# EAGLE board CT_schematic (EAGLE 7.6.0)

Size 100 x 80 mm. Coordinates in mm from the lower left corner, seen from the top.
Outline: 0,0 100,0 100,80 0,80 0,0
Copper layers (1*16): Top 0.035mm / dielectric 1.5mm / Bottom 0.035mm
Design rules "default": minimum track width 10mil, minimum drill 24mil, track to track 8mil, track to pad 8mil, pad to pad 8mil, via to via 8mil, smd to smd 8mil, copper to edge 40mil, drill to drill 8mil, minimum pad ring 10mil, minimum via ring 8mil, stop-mask expansion 4mil, vias tented up to drill 0mil, thermal gap 10mil

## Footprints (pad centres in the part's own frame; a part is rotated, then mirrored left to right if it is on the bottom)
C0603 = smd 0.8 x 0.8: 1 -0.762,0; 2 0.762,0
C0402 = smd 0.5 x 0.5: 1 -0.508,0; 2 0.508,0
C1210 = smd 1.2 x 2.5: 1 -1.524,0; 2 1.524,0
C0805 = smd 1.2 x 1.3: 1 -1.016,0; 2 1.016,0
EXV-9B = smd 2.718 x 1.778: 1 -2.108,0; 2 2.108,0
EXV-9H = smd 3.505 x 1.676: 1 -2.857,0; 2 2.857,0
L0603 = smd 0.8 x 0.8: 1 -0.762,0; 2 0.762,0
PJ-037B_PACKAGE = drill 3.7 square: 1 12,0 | drill 3.2 square: 2 6,0
R0603 = smd 0.8 x 0.8: 1 -0.762,0; 2 0.762,0
LQFP48 = smd 0.3 x 1.2: 1 -2.75,-4.25; 2 -2.25,-4.25; 3 -1.75,-4.25; 4 -1.25,-4.25; 5 -0.75,-4.25; 6 -0.25,-4.25; 7 0.25,-4.25; 8 0.75,-4.25; 9 1.25,-4.25; 10 1.75,-4.25; 11 2.25,-4.25; 12 2.75,-4.25; 25 2.75,4.25; 26 2.25,4.25; 27 1.75,4.25; 28 1.25,4.25; 29 0.75,4.25; 30 0.25,4.25; 31 -0.25,4.25; 32 -0.75,4.25; 33 -1.25,4.25; 34 -1.75,4.25; 35 -2.25,4.25; 36 -2.75,4.25 | smd 1.2 x 0.3: 13 4.25,-2.75; 14 4.25,-2.25; 15 4.25,-1.75; 16 4.25,-1.25; 17 4.25,-0.75; 18 4.25,-0.25; 19 4.25,0.25; 20 4.25,0.75; 21 4.25,1.25; 22 4.25,1.75; 23 4.25,2.25; 24 4.25,2.75; 37 -4.25,2.75; 38 -4.25,2.25; 39 -4.25,1.75; 40 -4.25,1.25; 41 -4.25,0.75; 42 -4.25,0.25; 43 -4.25,-0.25; 44 -4.25,-0.75; 45 -4.25,-1.25; 46 -4.25,-1.75; 47 -4.25,-2.25; 48 -4.25,-2.75
TST-110-05-T-D-RA = drill 1 pad 1.7 square: 1 0,0 | drill 1 pad 1.7: 2 0,2.54; 3 2.54,0; 4 2.54,2.54; 5 5.08,0; 6 5.08,2.54; 7 7.62,0; 8 7.62,2.54; 9 10.16,0; 10 10.16,2.54; 11 12.7,0; 12 12.7,2.54; 13 15.24,0; 14 15.24,2.54; 15 17.78,0; 16 17.78,2.54; 17 20.32,0; 18 20.32,2.54; 19 22.86,0; 20 22.86,2.54
QFN-28 = smd 0.813 x 0.305: 1 -2.451,1.5; 2 -2.451,1; 3 -2.451,0.5; 4 -2.451,0; 5 -2.451,-0.5; 6 -2.451,-1; 7 -2.451,-1.5; 15 2.451,-1.5; 16 2.451,-1; 17 2.451,-0.5; 18 2.451,0; 19 2.451,0.5; 20 2.451,1; 21 2.451,1.5 | smd 0.305 x 0.813: 8 -1.5,-2.451; 9 -1,-2.451; 10 -0.5,-2.451; 11 0,-2.451; 12 0.5,-2.451; 13 1,-2.451; 14 1.5,-2.451; 22 1.5,2.451; 23 1,2.451; 24 0.5,2.451; 25 0,2.451; 26 -0.5,2.451; 27 -1,2.451; 28 -1.5,2.451 | smd 3.607 x 3.607: 29 0,0
SJ-43515TS-SMT-TR = smd 2.2 x 3: 1 0.6,-7.4; 4 3.4,-7.4 | smd 3 x 3: 2 12.8,-7.4; 5 17,-3 | smd 2 x 3: 3 5.3,0; 6 2.5,0 | drill 1.8: P$7 4.5,-3.69; P$8 11.54,-3.69
ABS07-32.768KHZ-7-T = smd 1.1 x 2.4: 1 -2.5,0; 2 0,0
ABLS-25.000MHZ-B2F-T = smd 5.6 x 2.8: 1 -3.81,0; 2 5.69,0
ASFL1 = smd 1.7 x 1.5: 1 -1.27,-1.1; 2 1.27,-1.1; 3 1.27,1.1; 4 -1.27,1.1
LP2954 = smd 1.6 x 0.6: 1 -2.475,1.905 | smd 1.55 x 0.6: 2 -2.475,0.635; 3 -2.475,-0.635; 4 -2.475,-1.905; 5 2.475,-1.905; 6 2.475,-0.635; 7 2.475,0.635; 8 2.475,1.905
SON-6 = smd 0.55 x 0.3: 1 -0.355,0.5 | smd 0.52 x 0.3: 2 -0.37,0; 3 -0.37,-0.5; 4 0.37,-0.5; 5 0.37,0; 6 0.37,0.5
SW_4-1437565-2 = smd 1.4 x 2.1: 1 -2.23,4.55; 2 -2.23,-4.55; 3 2.23,4.55; 4 2.23,-4.55
LGM67K-G1J2-24-Z = smd 0.8 x 1.4: A -2,0; C 0,0
NC7SZ125M5X = smd 1.3 x 0.7: 1 -1.3,0.95; 2 -1.3,0; 3 -1.3,-0.95; 4 1.3,-0.95; 5 1.3,0.95

## Placement (x,y rotation side)
C1  1e-07  [C0603]  -43.18,68.58 0 top  (outside the outline)
C2  1e-07  [C0603]  -46.99,68.58 0 top  (outside the outline)
C3  1e-07  [C0603]  -50.8,68.58 0 top  (outside the outline)
C4  1e-07  [C0603]  -54.61,68.58 0 top  (outside the outline)
C5  4.7e-06  [C0603]  -39.37,68.58 0 top  (outside the outline)
C6  1e-07  [C0603]  -58.42,68.58 0 top  (outside the outline)
C7  1e-08  [C0603]  -62.23,68.58 0 top  (outside the outline)
C8  1e-06  [C0603]  -66.04,68.58 0 top  (outside the outline)
C9  1e-11  [C0402]  -34.29,73.66 0 top  (outside the outline)
C10  1e-11  [C0402]  -38.1,73.66 0 top  (outside the outline)
C11  1e-11  [C0402]  -41.91,73.66 0 top  (outside the outline)
C12  1e-11  [C0402]  -45.72,73.66 0 top  (outside the outline)
C13  1e-07  [C0402]  -49.53,73.66 0 top  (outside the outline)
C14  2.2e-05  [C1210]  -24.13,55.88 0 top  (outside the outline)
C15  2.2e-05  [C1210]  -30.48,55.88 0 top  (outside the outline)
C16  1e-09  [C0402]  -53.34,73.66 0 top  (outside the outline)
C17  1e-09  [C0402]  -57.15,73.66 0 top  (outside the outline)
C18  1e-07  [C0402]  -60.96,73.66 0 top  (outside the outline)
C19  1e-07  [C0402]  -64.77,73.66 0 top  (outside the outline)
C20  1e-07  [C0402]  -68.58,73.66 0 top  (outside the outline)
C21  1e-07  [C0402]  -72.39,73.66 0 top  (outside the outline)
C22  1e-07  [C0402]  -15.24,78.74 0 top  (outside the outline)
C23  1e-05  [C0805]  -67.31,55.88 0 top  (outside the outline)
C24  1e-05  [C0805]  -72.39,55.88 0 top  (outside the outline)
C25  1e-05  [C0805]  -15.24,63.5 0 top  (outside the outline)
C26  1e-05  [C0805]  -20.32,63.5 0 top  (outside the outline)
C27  1e-05  [C0805]  -25.4,63.5 0 top  (outside the outline)
C28  1e-08  [C0402]  -19.05,78.74 0 top  (outside the outline)
C29  1e-06  [EXV-9B]  -38.1,55.88 0 top  (outside the outline)
C30  2.2e-06  [EXV-9B]  -46.99,55.88 0 top  (outside the outline)
C31  1e-07  [C0402]  -22.86,78.74 0 top  (outside the outline)
C32  0.0001  [EXV-9H]  -54.61,41.91 0 top  (outside the outline)
C33  0.0001  [EXV-9H]  -66.04,41.91 0 top  (outside the outline)
C34  1e-08  [C0402]  -26.67,78.74 0 top  (outside the outline)
C35  1e-08  [C0402]  -30.48,78.74 0 top  (outside the outline)
F1  240.0  [L0603]  -69.85,68.58 0 top  (outside the outline)
J1  PJ-037B  [PJ-037B_PACKAGE]  -27.94,21.59 0 top  (outside the outline)
R1  10000.0  [R0603]  -60.96,62.23 0 top  (outside the outline)
R2  1000.0  [R0603]  -15.24,73.66 0 top  (outside the outline)
R3  1600.5  [R0603]  -19.05,73.66 0 top  (outside the outline)
R4  4700.0  [R0603]  -22.86,73.66 0 top  (outside the outline)
R5  10000.0  [R0603]  -66.04,62.23 0 top  (outside the outline)
R6  10000.0  [R0603]  -71.12,62.23 0 top  (outside the outline)
R7  47000.0  [R0603]  -15.24,68.58 0 top  (outside the outline)
R8  47000.0  [R0603]  -20.32,68.58 0 top  (outside the outline)
R9  47000.0  [R0603]  -25.4,68.58 0 top  (outside the outline)
R10  680.0  [R0603]  -26.67,73.66 0 top  (outside the outline)
R11  100000.0  [R0603]  -35.56,62.23 0 top  (outside the outline)
R12  100000.0  [R0603]  -40.64,62.23 0 top  (outside the outline)
R13  164658.62  [R0603]  -30.48,62.23 0 top  (outside the outline)
R14  100000.0  [R0603]  -45.72,62.23 0 top  (outside the outline)
R15  10000.0  [R0603]  -30.48,68.58 0 top  (outside the outline)
R16  10000.0  [R0603]  -35.56,68.58 0 top  (outside the outline)
R17  9100.0  [R0603]  -30.48,73.66 0 top  (outside the outline)
R18  680000.0  [R0603]  -50.8,62.23 0 top  (outside the outline)
R19  120000.0  [R0603]  -55.88,62.23 0 top  (outside the outline)
U1  STM32L071C8T7  [LQFP48]  -59.69,20.32 0 top  (outside the outline)
U2  TST-110-05-T-D-RA  [TST-110-05-T-D-RA]  -46.99,39.37 0 top  (outside the outline)
U3  WM8731CLSEFL  [QFN-28]  -16.51,57.15 0 top  (outside the outline)
U4  SJ-43515TS-SMT-TR  [SJ-43515TS-SMT-TR]  -39.37,10.16 0 top  (outside the outline)
U5  SJ-43515TS-SMT-TR  [SJ-43515TS-SMT-TR]  -67.31,10.16 0 top  (outside the outline)
U6  ABS07-32.768KHZ-7-T  [ABS07-32.768KHZ-7-T]  -49.53,49.53 0 top  (outside the outline)
U7  ABLS-25.000MHZ-B2F-T  [ABLS-25.000MHZ-B2F-T]  -26.67,49.53 0 top  (outside the outline)
U8  ASFL1-12.288MHZ-EC-T  [ASFL1]  -46.99,33.02 0 top  (outside the outline)
U9  LP2954AIMX/NOPB  [LP2954]  -25.4,33.02 0 top  (outside the outline)
U10  TPS3895ADRYR  [SON-6]  -33.02,77.47 0 top  (outside the outline)
U11  4-1437565-2  [SW_4-1437565-2]  -44.45,21.59 0 top  (outside the outline)
U12  Q65110A2395  [LGM67K-G1J2-24-Z]  -58.42,49.53 0 top  (outside the outline)
U13  nc7sz125m5x  [NC7SZ125M5X]  -54.61,55.88 0 top  (outside the outline)
U14  nc7sz125m5x  [NC7SZ125M5X]  -60.96,55.88 0 top  (outside the outline)

## Library data of the parts
C1-C35 F1 J1 R1-R19 U1-U14 = circuit_tree

## Nets
CLK_CRYSTAL_U1_3: C9.1 U1.3 U6.1
CLK_CRYSTAL_U1_4: C10.1 U1.4 U6.2
CLK_CRYSTAL_U1_5: C11.1 U1.5 U7.1
CLK_CRYSTAL_U1_6: C12.1 U1.6 U7.2
CLK_U3_1: U3.1 U8.3
GND: C1.2 C2.2 C3.2 C4.2 C5.2 C6.2 C7.2 C8.2 C9.2 C10.2 C11.2 C12.2 C13.2 C17.2 C18.2 C19.2 C20.2 C21.2 C22.2 C23.2 C24.2 C25.2 C26.2 C27.2 C28.2 C29.2 C30.2 C31.2 C32.2 C33.2 C34.2 C35.2 J1.2 R2.2 R5.2 R7.2 R8.2 R9.2 R14.2 R17.2 R19.2 U1.8 U1.23 U1.35 U1.47 U2.4 U2.6 U2.8 U2.10 U2.12 U2.14 U2.16 U2.18 U2.20 U3.4 U3.15 U3.19 U3.25 U3.26 U3.29 U4.1 U5.1 U8.2 U9.4 U10.2 U12.C U13.2 U13.3 U14.1 U14.3
NET_U1_7: R4.1 U1.7 U14.4
NET_U1_9: C7.1 C8.1 F1.1 U1.9
NET_U1_44: R5.1 U1.44
NET_U1_45: R3.1 U1.45 U12.A
NET_U1_46: R1.1 U1.46 U11.3 U11.4
NET_U3_9: U3.9
NET_U3_20: C22.1 C27.1 U3.20
NET_U4_2: C15.1 R8.1 U4.2
NET_U4_5: C14.1 R7.1 U4.5
NET_U4_13: C14.2
NET_U4_14: C15.2
NET_U5_5: C16.1 C17.1 R9.1 R10.1 U5.5
NET_U5_21: R10.2
NET_U5_22: C16.2
NET_U9_3: R12.1 U9.3
NET_U9_5: R11.1 U9.5
NET_U9_7: R13.2 R14.1 U9.7
NET_U10_1: R16.1 R17.1 U10.1
NET_U10_3: R18.2 R19.1 U10.3
NET_U10_4: R15.1 U10.4 U13.4 U14.2
NET_U11_1: R2.1 U11.1 U11.2
PROC_I2S2_CK: U1.26 U3.7
PROC_I2S2_SD: U1.28 U3.8
PROC_I2S2_WS: U1.25 U3.9 U3.11
PROC_SYS_SWCLK: U1.37 U2.9
PROC_SYS_SWDIO: U1.34 U2.7
RST_OUT_U2_SRESET_B: R6.1 U2.15 U13.1
VCC_S1_11V3: C29.1 C32.1 C33.1 J1.1 R12.2 U9.8
VCC_TIER1_3V3: C1.1 C2.1 C3.1 C4.1 C5.1 C6.1 C13.1 C18.1 C19.1 C20.1 C21.1 C23.1 C24.1 C25.1 C26.1 C28.1 C30.1 C31.1 C34.1 C35.1 F1.2 R1.2 R3.2 R4.2 R6.2 R11.2 R13.1 R15.2 R16.2 R18.1 U1.1 U1.24 U1.36 U1.48 U2.1 U3.3 U3.5 U3.12 U3.18 U8.4 U9.1 U10.6 U13.5 U14.5

## Tracks (layer width: path | path; a pad name or v marks a point on that pad's centre or on a via)
CLK_CRYSTAL_U1_3  (2 unrouted)
CLK_CRYSTAL_U1_4  (2 unrouted)
CLK_CRYSTAL_U1_5  (2 unrouted)
CLK_CRYSTAL_U1_6  (2 unrouted)
CLK_U3_1  (1 unrouted)
GND  (69 unrouted)
NET_U1_7  (2 unrouted)
NET_U1_9  (3 unrouted)
NET_U1_44  (1 unrouted)
NET_U1_45  (2 unrouted)
NET_U1_46  (3 unrouted)
NET_U3_20  (2 unrouted)
NET_U4_2  (2 unrouted)
NET_U4_5  (2 unrouted)
NET_U5_5  (4 unrouted)
NET_U9_3  (1 unrouted)
NET_U9_5  (1 unrouted)
NET_U9_7  (2 unrouted)
NET_U10_1  (2 unrouted)
NET_U10_3  (2 unrouted)
NET_U10_4  (3 unrouted)
NET_U11_1  (2 unrouted)
PROC_I2S2_CK  (1 unrouted)
PROC_I2S2_SD  (1 unrouted)
PROC_I2S2_WS  (2 unrouted)
PROC_SYS_SWCLK  (1 unrouted)
PROC_SYS_SWDIO  (1 unrouted)
RST_OUT_U2_SRESET_B  (2 unrouted)
VCC_S1_11V3  (5 unrouted)
VCC_TIER1_3V3  (43 unrouted)